# EAGLE board FT232R-Breakout-GiantPanel-v37 (EAGLE 6.5.0), part 1 of 8
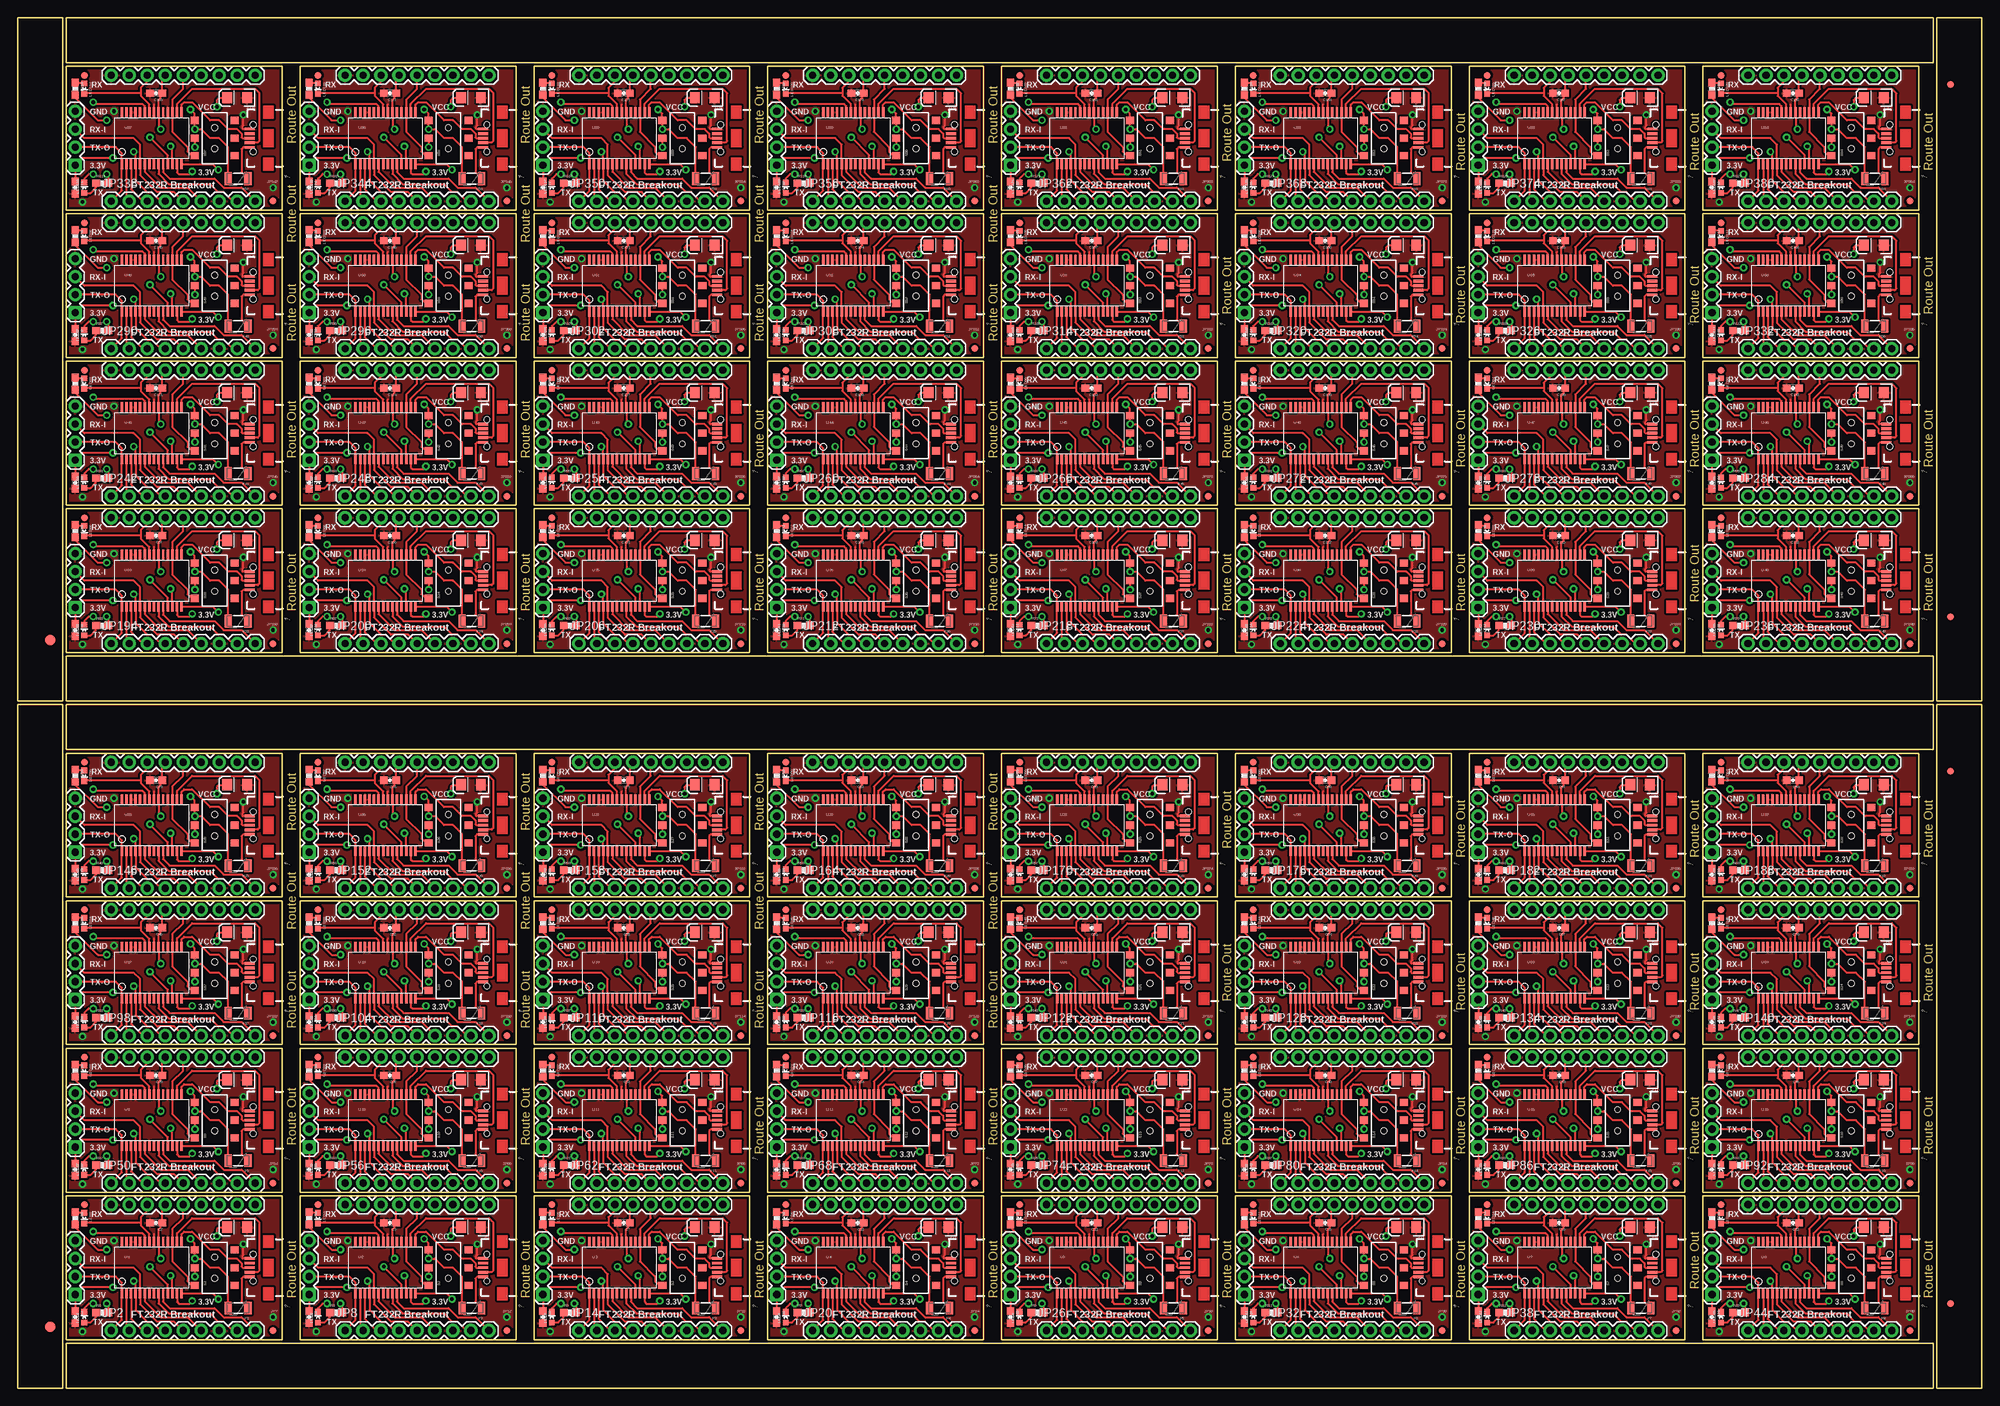
[diagram p0: board, top side]
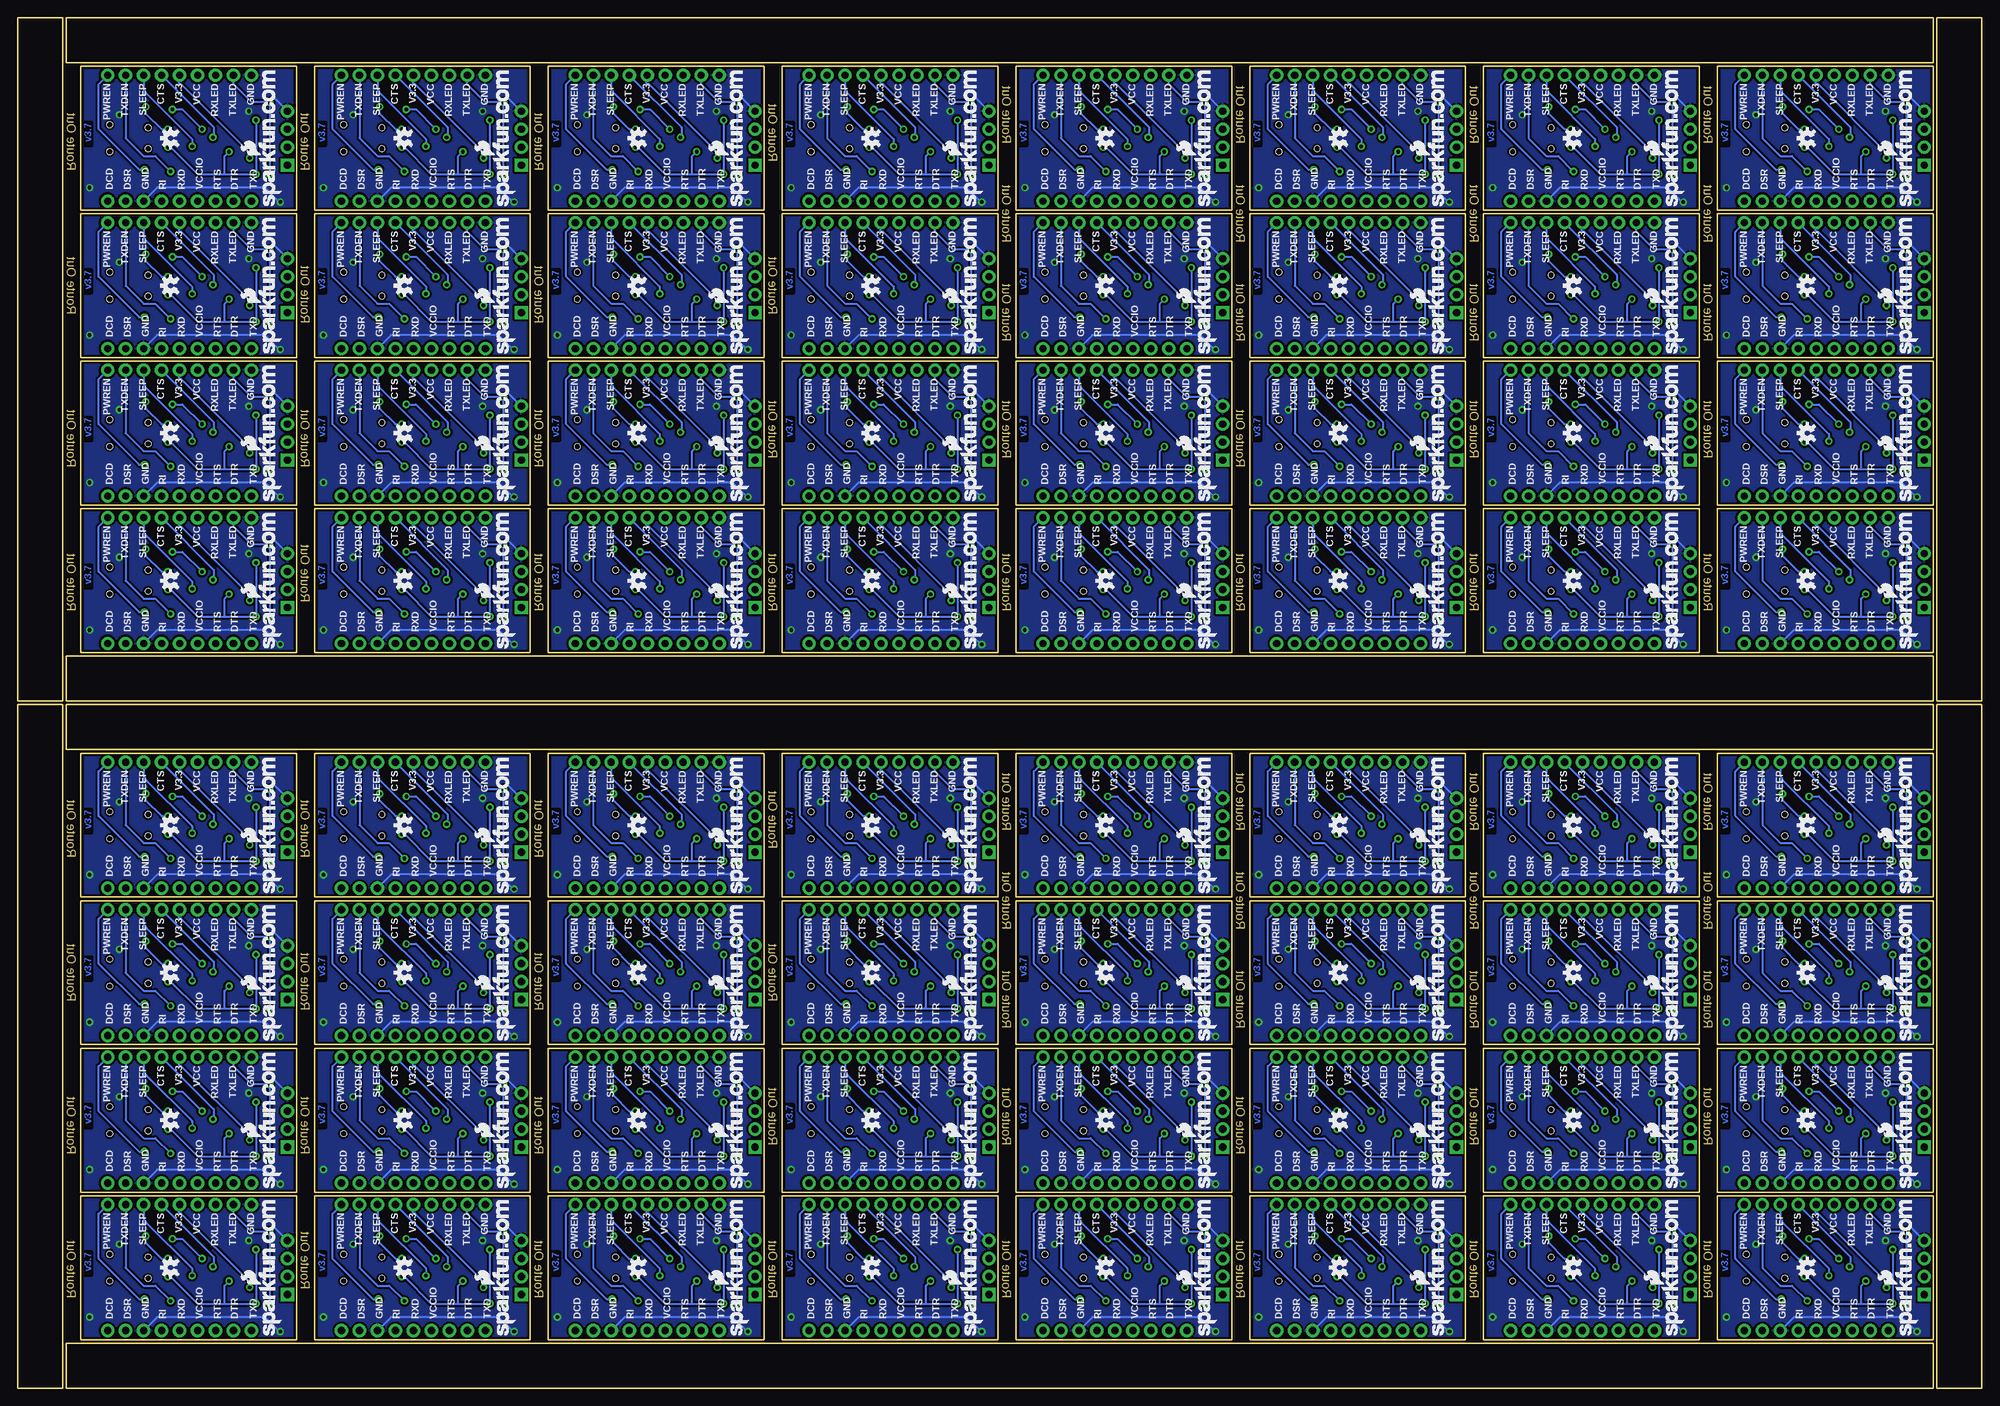
[diagram p1: board, bottom side, seen from below]

Size 277.37 x 193.55 mm. Coordinates in mm from the lower left corner, seen from the top.
Outline: 296 segments
Copper layers (1*16): Top 0.035mm / dielectric 1.5mm / Bottom 0.035mm
Design rules "SparkFun *": minimum track width 8mil, minimum drill 20mil, track to track 8mil, track to pad 8mil, pad to pad 8mil, via to via 8mil, smd to smd 8mil, copper to edge 10mil, drill to drill 8mil, minimum pad ring 12mil, minimum via ring 10mil, stop-mask expansion 4mil, vias tented up to drill 20mil, thermal gap 10mil
Net classes: 0 default: width 0.203 mm; 1 power: width 0.254 mm

## Footprints (pad centres in the part's own frame; a part is rotated, then mirrored left to right if it is on the bottom)
0603-CAP = smd 1.1 x 1: 1 -0.85,0; 2 0.85,0
EIA3216 = smd 1.4 x 1.6: A 1.4,0; C -1.4,0
FIDUCIAL-1.5X3 = smd 1.5 x 1.5: 1 0,0
FIDUCIAL-1X2 = smd 1 x 1: 1 0,0
PTC-1206 = smd 1 x 1.8: 1 -1.4,0; 2 1.4,0
1X09 = drill 1.016 pad 1.88: 1 0,0; 2 2.54,0; 3 5.08,0; 4 7.62,0; 5 10.16,0; 6 12.7,0; 7 15.24,0; 8 17.78,0; 9 20.32,0
1X04 = drill 1.016 pad 1.88 square: 1 0,0 | drill 1.016 pad 1.88: 2 2.54,0; 3 5.08,0; 4 7.62,0
USB-B-MICRO-SMD_V03 = smd 1.4 x 0.4: D+1 2.7,0; D-1 2.7,0.65; GND1 2.7,-1.3; ID1 2.7,-0.65; VBUS1 2.7,1.3 | hole 0.85: 2.2,1.9; 2.2,-1.9
LED-0603 = smd 0.8 x 0.8: A 0,-0.75; C 0,0.75
0603-RES = smd 1.1 x 1: 1 -0.85,0; 2 0.85,0
AYZ0202 = smd 1 x 1.15: 1 -2.5,2.825; 2 0,2.825; 3 2.5,2.825; 4 -2.5,-2.825; 5 0,-2.825; 6 2.5,-2.825 | hole 0.85: 1.5,0; -1.5,0
SSOP28DB = smd 0.348 x 1.397: 1 -4.225,-3.656; 2 -3.575,-3.656; 3 -2.925,-3.656; 4 -2.275,-3.656; 5 -1.625,-3.656; 6 -0.975,-3.656; 7 -0.325,-3.656; 8 0.325,-3.656; 9 0.975,-3.656; 10 1.625,-3.656; 11 2.275,-3.656; 12 2.925,-3.656; 13 3.575,-3.656; 14 4.225,-3.656; 15 4.225,3.656; 16 3.575,3.656; 17 2.925,3.656; 18 2.275,3.656; 19 1.625,3.656; 20 0.975,3.656; 21 0.325,3.656; 22 -0.325,3.656; 23 -0.975,3.656; 24 -1.625,3.656; 25 -2.275,3.656; 26 -2.925,3.656; 27 -3.575,3.656; 28 -4.225,3.656

## Placement (x,y rotation side)
C1  0.1uF  [0603-CAP]  8.13,10.03 270 top
C2  0.1uF  [0603-CAP]  19.56,23.37 180 top
C3  0.1uF  [0603-CAP]  52.58,23.37 180 top
C4  10uF  [EIA3216]  64.01,22.73 180 top
C5  10uF  [EIA3216]  30.99,22.73 180 top
C6  0.1uF  [0603-CAP]  41.15,10.03 270 top
C7  0.1uF  [0603-CAP]  85.6,23.37 180 top
C8  10uF  [EIA3216]  97.03,22.73 180 top
C9  0.1uF  [0603-CAP]  74.17,10.03 270 top
C10  0.1uF  [0603-CAP]  118.62,23.37 180 top
C11  10uF  [EIA3216]  130.05,22.73 180 top
C12  0.1uF  [0603-CAP]  107.19,10.03 270 top
C13  0.1uF  [0603-CAP]  151.64,23.37 180 top
C14  10uF  [EIA3216]  163.07,22.73 180 top
C15  0.1uF  [0603-CAP]  140.21,10.03 270 top
C16  0.1uF  [0603-CAP]  184.66,23.37 180 top
C17  10uF  [EIA3216]  196.09,22.73 180 top
C18  0.1uF  [0603-CAP]  173.23,10.03 270 top
C19  0.1uF  [0603-CAP]  217.68,23.37 180 top
C20  10uF  [EIA3216]  229.11,22.73 180 top
C21  0.1uF  [0603-CAP]  206.25,10.03 270 top
C22  0.1uF  [0603-CAP]  250.7,23.37 180 top
C23  10uF  [EIA3216]  262.13,22.73 180 top
C24  0.1uF  [0603-CAP]  239.27,10.03 270 top
C25  0.1uF  [0603-CAP]  19.56,44.2 180 top
C26  10uF  [EIA3216]  30.99,43.56 180 top
C27  0.1uF  [0603-CAP]  8.13,30.86 270 top
C28  0.1uF  [0603-CAP]  52.58,44.2 180 top
C29  10uF  [EIA3216]  64.01,43.56 180 top
C30  0.1uF  [0603-CAP]  41.15,30.86 270 top
C31  0.1uF  [0603-CAP]  85.6,44.2 180 top
C32  10uF  [EIA3216]  97.03,43.56 180 top
C33  0.1uF  [0603-CAP]  74.17,30.86 270 top
C34  0.1uF  [0603-CAP]  118.62,44.2 180 top
C35  10uF  [EIA3216]  130.05,43.56 180 top
C36  0.1uF  [0603-CAP]  107.19,30.86 270 top
C37  0.1uF  [0603-CAP]  151.64,44.2 180 top
C38  10uF  [EIA3216]  163.07,43.56 180 top
C39  0.1uF  [0603-CAP]  140.21,30.86 270 top
C40  0.1uF  [0603-CAP]  184.66,44.2 180 top
C41  10uF  [EIA3216]  196.09,43.56 180 top
C42  0.1uF  [0603-CAP]  173.23,30.86 270 top
C43  0.1uF  [0603-CAP]  217.68,44.2 180 top
C44  10uF  [EIA3216]  229.11,43.56 180 top
C45  0.1uF  [0603-CAP]  206.25,30.86 270 top
C46  0.1uF  [0603-CAP]  250.7,44.2 180 top
C47  10uF  [EIA3216]  262.13,43.56 180 top
C48  0.1uF  [0603-CAP]  239.27,30.86 270 top
C49  0.1uF  [0603-CAP]  19.56,65.02 180 top
C50  10uF  [EIA3216]  30.99,64.39 180 top
C51  0.1uF  [0603-CAP]  8.13,51.69 270 top
C52  0.1uF  [0603-CAP]  52.58,65.02 180 top
C53  10uF  [EIA3216]  64.01,64.39 180 top
C54  0.1uF  [0603-CAP]  41.15,51.69 270 top
C55  0.1uF  [0603-CAP]  85.6,65.02 180 top
C56  10uF  [EIA3216]  97.03,64.39 180 top
C57  0.1uF  [0603-CAP]  74.17,51.69 270 top
C58  0.1uF  [0603-CAP]  118.62,65.02 180 top
C59  10uF  [EIA3216]  130.05,64.39 180 top
C60  0.1uF  [0603-CAP]  107.19,51.69 270 top
C61  0.1uF  [0603-CAP]  151.64,65.02 180 top
C62  10uF  [EIA3216]  163.07,64.39 180 top
C63  0.1uF  [0603-CAP]  140.21,51.69 270 top
C64  0.1uF  [0603-CAP]  184.66,65.02 180 top
C65  10uF  [EIA3216]  196.09,64.39 180 top
C66  0.1uF  [0603-CAP]  173.23,51.69 270 top
C67  0.1uF  [0603-CAP]  217.68,65.02 180 top
C68  10uF  [EIA3216]  229.11,64.39 180 top
C69  0.1uF  [0603-CAP]  206.25,51.69 270 top
C70  0.1uF  [0603-CAP]  250.7,65.02 180 top
C71  10uF  [EIA3216]  262.13,64.39 180 top
C72  0.1uF  [0603-CAP]  239.27,51.69 270 top
C73  0.1uF  [0603-CAP]  19.56,85.85 180 top
C74  10uF  [EIA3216]  30.99,85.22 180 top
C75  0.1uF  [0603-CAP]  8.13,72.52 270 top
C76  0.1uF  [0603-CAP]  52.58,85.85 180 top
C77  10uF  [EIA3216]  64.01,85.22 180 top
C78  0.1uF  [0603-CAP]  41.15,72.52 270 top
C79  0.1uF  [0603-CAP]  85.6,85.85 180 top
C80  10uF  [EIA3216]  97.03,85.22 180 top
C81  0.1uF  [0603-CAP]  74.17,72.52 270 top
C82  0.1uF  [0603-CAP]  118.62,85.85 180 top
C83  10uF  [EIA3216]  130.05,85.22 180 top
C84  0.1uF  [0603-CAP]  107.19,72.52 270 top
C85  0.1uF  [0603-CAP]  151.64,85.85 180 top
C86  10uF  [EIA3216]  163.07,85.22 180 top
C87  0.1uF  [0603-CAP]  140.21,72.52 270 top
C88  0.1uF  [0603-CAP]  184.66,85.85 180 top
C89  10uF  [EIA3216]  196.09,85.22 180 top
C90  0.1uF  [0603-CAP]  173.23,72.52 270 top
C91  0.1uF  [0603-CAP]  217.68,85.85 180 top
C92  10uF  [EIA3216]  229.11,85.22 180 top
C93  0.1uF  [0603-CAP]  206.25,72.52 270 top
C94  0.1uF  [0603-CAP]  250.7,85.85 180 top
C95  10uF  [EIA3216]  262.13,85.22 180 top
C96  0.1uF  [0603-CAP]  239.27,72.52 270 top
C97  0.1uF  [0603-CAP]  19.56,120.4 180 top
C98  10uF  [EIA3216]  30.99,119.76 180 top
C99  0.1uF  [0603-CAP]  8.13,107.06 270 top
C100  0.1uF  [0603-CAP]  52.58,120.4 180 top
C101  10uF  [EIA3216]  64.01,119.76 180 top
C102  0.1uF  [0603-CAP]  41.15,107.06 270 top
C103  0.1uF  [0603-CAP]  85.6,120.4 180 top
C104  10uF  [EIA3216]  97.03,119.76 180 top
C105  0.1uF  [0603-CAP]  74.17,107.06 270 top
C106  0.1uF  [0603-CAP]  118.62,120.4 180 top
C107  10uF  [EIA3216]  130.05,119.76 180 top
C108  0.1uF  [0603-CAP]  107.19,107.06 270 top
C109  0.1uF  [0603-CAP]  151.64,120.4 180 top
C110  10uF  [EIA3216]  163.07,119.76 180 top
C111  0.1uF  [0603-CAP]  140.21,107.06 270 top
C112  0.1uF  [0603-CAP]  184.66,120.4 180 top
C113  10uF  [EIA3216]  196.09,119.76 180 top
C114  0.1uF  [0603-CAP]  173.23,107.06 270 top
C115  0.1uF  [0603-CAP]  217.68,120.4 180 top
C116  10uF  [EIA3216]  229.11,119.76 180 top
C117  0.1uF  [0603-CAP]  206.25,107.06 270 top
C118  0.1uF  [0603-CAP]  250.7,120.4 180 top
C119  10uF  [EIA3216]  262.13,119.76 180 top
C120  0.1uF  [0603-CAP]  239.27,107.06 270 top
C121  0.1uF  [0603-CAP]  19.56,141.22 180 top
C122  10uF  [EIA3216]  30.99,140.59 180 top
C123  0.1uF  [0603-CAP]  8.13,127.89 270 top
C124  0.1uF  [0603-CAP]  52.58,141.22 180 top
C125  10uF  [EIA3216]  64.01,140.59 180 top
C126  0.1uF  [0603-CAP]  41.15,127.89 270 top
C127  0.1uF  [0603-CAP]  85.6,141.22 180 top
C128  10uF  [EIA3216]  97.03,140.59 180 top
C129  0.1uF  [0603-CAP]  74.17,127.89 270 top
C130  0.1uF  [0603-CAP]  118.62,141.22 180 top
C131  10uF  [EIA3216]  130.05,140.59 180 top
C132  0.1uF  [0603-CAP]  107.19,127.89 270 top
C133  0.1uF  [0603-CAP]  151.64,141.22 180 top
C134  10uF  [EIA3216]  163.07,140.59 180 top
C135  0.1uF  [0603-CAP]  140.21,127.89 270 top
C136  0.1uF  [0603-CAP]  184.66,141.22 180 top
C137  10uF  [EIA3216]  196.09,140.59 180 top
C138  0.1uF  [0603-CAP]  173.23,127.89 270 top
C139  0.1uF  [0603-CAP]  217.68,141.22 180 top
C140  10uF  [EIA3216]  229.11,140.59 180 top
C141  0.1uF  [0603-CAP]  206.25,127.89 270 top
C142  0.1uF  [0603-CAP]  250.7,141.22 180 top
C143  10uF  [EIA3216]  262.13,140.59 180 top
C144  0.1uF  [0603-CAP]  239.27,127.89 270 top
C145  0.1uF  [0603-CAP]  19.56,162.05 180 top
C146  10uF  [EIA3216]  30.99,161.42 180 top
C147  0.1uF  [0603-CAP]  8.13,148.72 270 top
C148  0.1uF  [0603-CAP]  52.58,162.05 180 top
C149  10uF  [EIA3216]  64.01,161.42 180 top
C150  0.1uF  [0603-CAP]  41.15,148.72 270 top
C151  0.1uF  [0603-CAP]  85.6,162.05 180 top
C152  10uF  [EIA3216]  97.03,161.42 180 top
C153  0.1uF  [0603-CAP]  74.17,148.72 270 top
C154  0.1uF  [0603-CAP]  118.62,162.05 180 top
C155  10uF  [EIA3216]  130.05,161.42 180 top
C156  0.1uF  [0603-CAP]  107.19,148.72 270 top
C157  0.1uF  [0603-CAP]  151.64,162.05 180 top
C158  10uF  [EIA3216]  163.07,161.42 180 top
C159  0.1uF  [0603-CAP]  140.21,148.72 270 top
C160  0.1uF  [0603-CAP]  184.66,162.05 180 top
C161  10uF  [EIA3216]  196.09,161.42 180 top
C162  0.1uF  [0603-CAP]  173.23,148.72 270 top
C163  0.1uF  [0603-CAP]  217.68,162.05 180 top
C164  10uF  [EIA3216]  229.11,161.42 180 top
C165  0.1uF  [0603-CAP]  206.25,148.72 270 top
C166  0.1uF  [0603-CAP]  250.7,162.05 180 top
C167  10uF  [EIA3216]  262.13,161.42 180 top
C168  0.1uF  [0603-CAP]  239.27,148.72 270 top
C169  0.1uF  [0603-CAP]  19.56,182.88 180 top
C170  10uF  [EIA3216]  30.99,182.25 180 top
C171  0.1uF  [0603-CAP]  8.13,169.54 270 top
C172  0.1uF  [0603-CAP]  52.58,182.88 180 top
C173  10uF  [EIA3216]  64.01,182.25 180 top
C174  0.1uF  [0603-CAP]  41.15,169.54 270 top
C175  0.1uF  [0603-CAP]  85.6,182.88 180 top
C176  10uF  [EIA3216]  97.03,182.25 180 top
C177  0.1uF  [0603-CAP]  74.17,169.54 270 top
C178  0.1uF  [0603-CAP]  118.62,182.88 180 top
C179  10uF  [EIA3216]  130.05,182.25 180 top
C180  0.1uF  [0603-CAP]  107.19,169.54 270 top
C181  0.1uF  [0603-CAP]  151.64,182.88 180 top
C182  10uF  [EIA3216]  163.07,182.25 180 top
C183  0.1uF  [0603-CAP]  140.21,169.54 270 top
C184  0.1uF  [0603-CAP]  184.66,182.88 180 top
C185  10uF  [EIA3216]  196.09,182.25 180 top
C186  0.1uF  [0603-CAP]  173.23,169.54 270 top
C187  0.1uF  [0603-CAP]  217.68,182.88 180 top
C188  10uF  [EIA3216]  229.11,182.25 180 top
C189  0.1uF  [0603-CAP]  206.25,169.54 270 top
C190  0.1uF  [0603-CAP]  250.7,182.88 180 top
C191  10uF  [EIA3216]  262.13,182.25 180 top
C192  0.1uF  [0603-CAP]  239.27,169.54 270 top
E$1  [FIDUCIAL-1.5X3]  4.57,8.64 0 top
E$2  [FIDUCIAL-1X2]  272.92,184.15 180 top
E$3  [FIDUCIAL-1X2]  272.92,108.97 0 top
E$4  [FIDUCIAL-1.5X3]  4.57,105.66 0 top
E$6  [FIDUCIAL-1X2]  272.92,87.12 180 top
E$8  [FIDUCIAL-1X2]  272.92,11.94 0 top
F1  500mA  [PTC-1206]  31.11,11.3 180 top
F2  500mA  [PTC-1206]  64.14,11.3 180 top
F3  500mA  [PTC-1206]  97.16,11.3 180 top
F4  500mA  [PTC-1206]  130.18,11.3 180 top
F5  500mA  [PTC-1206]  163.19,11.3 180 top
F6  500mA  [PTC-1206]  196.22,11.3 180 top
F7  500mA  [PTC-1206]  229.24,11.3 180 top
F8  500mA  [PTC-1206]  262.25,11.3 180 top
F9  500mA  [PTC-1206]  31.11,32.13 180 top
F10  500mA  [PTC-1206]  64.14,32.13 180 top
F11  500mA  [PTC-1206]  97.16,32.13 180 top
F12  500mA  [PTC-1206]  130.18,32.13 180 top
F13  500mA  [PTC-1206]  163.19,32.13 180 top
F14  500mA  [PTC-1206]  196.22,32.13 180 top
F15  500mA  [PTC-1206]  229.24,32.13 180 top
F16  500mA  [PTC-1206]  262.25,32.13 180 top
F17  500mA  [PTC-1206]  31.11,52.96 180 top
F18  500mA  [PTC-1206]  64.14,52.96 180 top
F19  500mA  [PTC-1206]  97.16,52.96 180 top
F20  500mA  [PTC-1206]  130.18,52.96 180 top
F21  500mA  [PTC-1206]  163.19,52.96 180 top
F22  500mA  [PTC-1206]  196.22,52.96 180 top
F23  500mA  [PTC-1206]  229.24,52.96 180 top
F24  500mA  [PTC-1206]  262.25,52.96 180 top
F25  500mA  [PTC-1206]  31.11,73.79 180 top
F26  500mA  [PTC-1206]  64.14,73.79 180 top
F27  500mA  [PTC-1206]  97.16,73.79 180 top
F28  500mA  [PTC-1206]  130.18,73.79 180 top
F29  500mA  [PTC-1206]  163.19,73.79 180 top
F30  500mA  [PTC-1206]  196.22,73.79 180 top
F31  500mA  [PTC-1206]  229.24,73.79 180 top
F32  500mA  [PTC-1206]  262.25,73.79 180 top
F33  500mA  [PTC-1206]  31.11,108.33 180 top
F34  500mA  [PTC-1206]  64.14,108.33 180 top
F35  500mA  [PTC-1206]  97.16,108.33 180 top
F36  500mA  [PTC-1206]  130.18,108.33 180 top
F37  500mA  [PTC-1206]  163.19,108.33 180 top
F38  500mA  [PTC-1206]  196.22,108.33 180 top
F39  500mA  [PTC-1206]  229.24,108.33 180 top
F40  500mA  [PTC-1206]  262.25,108.33 180 top
F41  500mA  [PTC-1206]  31.11,129.16 180 top
F42  500mA  [PTC-1206]  64.14,129.16 180 top
F43  500mA  [PTC-1206]  97.16,129.16 180 top
F44  500mA  [PTC-1206]  130.18,129.16 180 top
F45  500mA  [PTC-1206]  163.19,129.16 180 top
F46  500mA  [PTC-1206]  196.22,129.16 180 top
F47  500mA  [PTC-1206]  229.24,129.16 180 top
F48  500mA  [PTC-1206]  262.25,129.16 180 top
F49  500mA  [PTC-1206]  31.11,149.99 180 top
F50  500mA  [PTC-1206]  64.14,149.99 180 top
F51  500mA  [PTC-1206]  97.16,149.99 180 top
F52  500mA  [PTC-1206]  130.18,149.99 180 top
F53  500mA  [PTC-1206]  163.19,149.99 180 top
F54  500mA  [PTC-1206]  196.22,149.99 180 top
F55  500mA  [PTC-1206]  229.24,149.99 180 top
F56  500mA  [PTC-1206]  262.25,149.99 180 top
F57  500mA  [PTC-1206]  31.11,170.81 180 top
F58  500mA  [PTC-1206]  64.14,170.81 180 top
F59  500mA  [PTC-1206]  97.16,170.81 180 top
F60  500mA  [PTC-1206]  130.18,170.81 180 top
F61  500mA  [PTC-1206]  163.19,170.81 180 top
F62  500mA  [PTC-1206]  196.22,170.81 180 top
F63  500mA  [PTC-1206]  229.24,170.81 180 top
F64  500mA  [PTC-1206]  262.25,170.81 180 top
JP1  [1X09]  13.21,25.91 0 top
JP2  [1X09]  13.21,8.13 0 top
JP3  [1X04]  8.13,13.21 90 top
JP4  [1X09]  46.23,25.91 0 top
JP5  FIDUCIAL1X2  [FIDUCIAL-1X2]  36.07,8.13 0 top
JP6  FIDUCIAL1X2  [FIDUCIAL-1X2]  9.4,25.91 0 top
JP7  USB_MICROB_PLUGCONN-11752  [USB-B-MICRO-SMD_V03]  35.43,17.02 180 top
JP8  [1X09]  46.23,8.13 0 top
JP9  [1X04]  41.15,13.21 90 top
JP10  FIDUCIAL1X2  [FIDUCIAL-1X2]  69.09,8.13 0 top
JP11  FIDUCIAL1X2  [FIDUCIAL-1X2]  42.42,25.91 0 top
JP12  USB_MICROB_PLUGCONN-11752  [USB-B-MICRO-SMD_V03]  68.45,17.02 180 top
JP13  [1X09]  79.25,25.91 0 top
JP14  [1X09]  79.25,8.13 0 top
JP15  [1X04]  74.17,13.21 90 top
JP16  FIDUCIAL1X2  [FIDUCIAL-1X2]  102.11,8.13 0 top
JP17  FIDUCIAL1X2  [FIDUCIAL-1X2]  75.44,25.91 0 top
JP18  USB_MICROB_PLUGCONN-11752  [USB-B-MICRO-SMD_V03]  101.47,17.02 180 top
JP19  [1X09]  112.27,25.91 0 top
JP20  [1X09]  112.27,8.13 0 top
JP21  [1X04]  107.19,13.21 90 top
JP22  FIDUCIAL1X2  [FIDUCIAL-1X2]  135.13,8.13 0 top
JP23  FIDUCIAL1X2  [FIDUCIAL-1X2]  108.46,25.91 0 top
JP24  USB_MICROB_PLUGCONN-11752  [USB-B-MICRO-SMD_V03]  134.49,17.02 180 top
JP25  [1X09]  145.29,25.91 0 top
JP26  [1X09]  145.29,8.13 0 top
JP27  [1X04]  140.21,13.21 90 top
JP28  FIDUCIAL1X2  [FIDUCIAL-1X2]  168.15,8.13 0 top
JP29  FIDUCIAL1X2  [FIDUCIAL-1X2]  141.48,25.91 0 top
JP30  USB_MICROB_PLUGCONN-11752  [USB-B-MICRO-SMD_V03]  167.51,17.02 180 top
JP31  [1X09]  178.31,25.91 0 top
JP32  [1X09]  178.31,8.13 0 top
JP33  [1X04]  173.23,13.21 90 top
JP34  FIDUCIAL1X2  [FIDUCIAL-1X2]  201.17,8.13 0 top
JP35  FIDUCIAL1X2  [FIDUCIAL-1X2]  174.5,25.91 0 top
JP36  USB_MICROB_PLUGCONN-11752  [USB-B-MICRO-SMD_V03]  200.53,17.02 180 top
JP37  [1X09]  211.33,25.91 0 top
JP38  [1X09]  211.33,8.13 0 top
JP39  [1X04]  206.25,13.21 90 top
JP40  FIDUCIAL1X2  [FIDUCIAL-1X2]  234.19,8.13 0 top
JP41  FIDUCIAL1X2  [FIDUCIAL-1X2]  207.52,25.91 0 top
JP42  USB_MICROB_PLUGCONN-11752  [USB-B-MICRO-SMD_V03]  233.55,17.02 180 top
JP43  [1X09]  244.35,25.91 0 top
JP44  [1X09]  244.35,8.13 0 top
JP45  [1X04]  239.27,13.21 90 top
JP46  FIDUCIAL1X2  [FIDUCIAL-1X2]  267.21,8.13 0 top
JP47  FIDUCIAL1X2  [FIDUCIAL-1X2]  240.54,25.91 0 top
JP48  USB_MICROB_PLUGCONN-11752  [USB-B-MICRO-SMD_V03]  266.57,17.02 180 top
JP49  [1X09]  13.21,46.74 0 top
JP50  [1X09]  13.21,28.96 0 top
JP51  [1X04]  8.13,34.04 90 top
JP52  FIDUCIAL1X2  [FIDUCIAL-1X2]  36.07,28.96 0 top
JP53  FIDUCIAL1X2  [FIDUCIAL-1X2]  9.4,46.74 0 top
JP54  USB_MICROB_PLUGCONN-11752  [USB-B-MICRO-SMD_V03]  35.43,37.85 180 top
JP55  [1X09]  46.23,46.74 0 top
JP56  [1X09]  46.23,28.96 0 top
JP57  [1X04]  41.15,34.04 90 top
JP58  FIDUCIAL1X2  [FIDUCIAL-1X2]  69.09,28.96 0 top
JP59  FIDUCIAL1X2  [FIDUCIAL-1X2]  42.42,46.74 0 top
JP60  USB_MICROB_PLUGCONN-11752  [USB-B-MICRO-SMD_V03]  68.45,37.85 180 top
JP61  [1X09]  79.25,46.74 0 top
JP62  [1X09]  79.25,28.96 0 top
JP63  [1X04]  74.17,34.04 90 top
JP64  FIDUCIAL1X2  [FIDUCIAL-1X2]  102.11,28.96 0 top
JP65  FIDUCIAL1X2  [FIDUCIAL-1X2]  75.44,46.74 0 top
JP66  USB_MICROB_PLUGCONN-11752  [USB-B-MICRO-SMD_V03]  101.47,37.85 180 top
JP67  [1X09]  112.27,46.74 0 top
JP68  [1X09]  112.27,28.96 0 top
JP69  [1X04]  107.19,34.04 90 top
JP70  FIDUCIAL1X2  [FIDUCIAL-1X2]  135.13,28.96 0 top
JP71  FIDUCIAL1X2  [FIDUCIAL-1X2]  108.46,46.74 0 top
JP72  USB_MICROB_PLUGCONN-11752  [USB-B-MICRO-SMD_V03]  134.49,37.85 180 top
JP73  [1X09]  145.29,46.74 0 top
JP74  [1X09]  145.29,28.96 0 top
JP75  [1X04]  140.21,34.04 90 top
JP76  FIDUCIAL1X2  [FIDUCIAL-1X2]  168.15,28.96 0 top
JP77  FIDUCIAL1X2  [FIDUCIAL-1X2]  141.48,46.74 0 top
JP78  USB_MICROB_PLUGCONN-11752  [USB-B-MICRO-SMD_V03]  167.51,37.85 180 top
JP79  [1X09]  178.31,46.74 0 top
JP80  [1X09]  178.31,28.96 0 top
JP81  [1X04]  173.23,34.04 90 top
JP82  FIDUCIAL1X2  [FIDUCIAL-1X2]  201.17,28.96 0 top
JP83  FIDUCIAL1X2  [FIDUCIAL-1X2]  174.5,46.74 0 top
JP84  USB_MICROB_PLUGCONN-11752  [USB-B-MICRO-SMD_V03]  200.53,37.85 180 top
JP85  [1X09]  211.33,46.74 0 top
JP86  [1X09]  211.33,28.96 0 top
JP87  [1X04]  206.25,34.04 90 top
JP88  FIDUCIAL1X2  [FIDUCIAL-1X2]  234.19,28.96 0 top
JP89  FIDUCIAL1X2  [FIDUCIAL-1X2]  207.52,46.74 0 top
JP90  USB_MICROB_PLUGCONN-11752  [USB-B-MICRO-SMD_V03]  233.55,37.85 180 top
JP91  [1X09]  244.35,46.74 0 top
JP92  [1X09]  244.35,28.96 0 top
JP93  [1X04]  239.27,34.04 90 top
JP94  FIDUCIAL1X2  [FIDUCIAL-1X2]  267.21,28.96 0 top
JP95  FIDUCIAL1X2  [FIDUCIAL-1X2]  240.54,46.74 0 top
JP96  USB_MICROB_PLUGCONN-11752  [USB-B-MICRO-SMD_V03]  266.57,37.85 180 top
JP97  [1X09]  13.21,67.56 0 top
JP98  [1X09]  13.21,49.78 0 top
JP99  [1X04]  8.13,54.86 90 top
JP100  FIDUCIAL1X2  [FIDUCIAL-1X2]  36.07,49.78 0 top
JP101  FIDUCIAL1X2  [FIDUCIAL-1X2]  9.4,67.56 0 top
JP102  USB_MICROB_PLUGCONN-11752  [USB-B-MICRO-SMD_V03]  35.43,58.67 180 top
JP103  [1X09]  46.23,67.56 0 top
JP104  [1X09]  46.23,49.78 0 top
JP105  [1X04]  41.15,54.86 90 top
JP106  FIDUCIAL1X2  [FIDUCIAL-1X2]  69.09,49.78 0 top
JP107  FIDUCIAL1X2  [FIDUCIAL-1X2]  42.42,67.56 0 top
JP108  USB_MICROB_PLUGCONN-11752  [USB-B-MICRO-SMD_V03]  68.45,58.67 180 top
JP109  [1X09]  79.25,67.56 0 top
JP110  [1X09]  79.25,49.78 0 top
JP111  [1X04]  74.17,54.86 90 top
JP112  FIDUCIAL1X2  [FIDUCIAL-1X2]  102.11,49.78 0 top
JP113  FIDUCIAL1X2  [FIDUCIAL-1X2]  75.44,67.56 0 top
JP114  USB_MICROB_PLUGCONN-11752  [USB-B-MICRO-SMD_V03]  101.47,58.67 180 top
JP115  [1X09]  112.27,67.56 0 top
JP116  [1X09]  112.27,49.78 0 top
JP117  [1X04]  107.19,54.86 90 top
JP118  FIDUCIAL1X2  [FIDUCIAL-1X2]  135.13,49.78 0 top
JP119  FIDUCIAL1X2  [FIDUCIAL-1X2]  108.46,67.56 0 top
JP120  USB_MICROB_PLUGCONN-11752  [USB-B-MICRO-SMD_V03]  134.49,58.67 180 top
JP121  [1X09]  145.29,67.56 0 top
JP122  [1X09]  145.29,49.78 0 top
JP123  [1X04]  140.21,54.86 90 top
JP124  FIDUCIAL1X2  [FIDUCIAL-1X2]  168.15,49.78 0 top
JP125  FIDUCIAL1X2  [FIDUCIAL-1X2]  141.48,67.56 0 top
JP126  USB_MICROB_PLUGCONN-11752  [USB-B-MICRO-SMD_V03]  167.51,58.67 180 top
JP127  [1X09]  178.31,67.56 0 top
JP128  [1X09]  178.31,49.78 0 top
JP129  [1X04]  173.23,54.86 90 top
JP130  FIDUCIAL1X2  [FIDUCIAL-1X2]  201.17,49.78 0 top
JP131  FIDUCIAL1X2  [FIDUCIAL-1X2]  174.5,67.56 0 top
JP132  USB_MICROB_PLUGCONN-11752  [USB-B-MICRO-SMD_V03]  200.53,58.67 180 top
JP133  [1X09]  211.33,67.56 0 top
JP134  [1X09]  211.33,49.78 0 top
JP135  [1X04]  206.25,54.86 90 top
JP136  FIDUCIAL1X2  [FIDUCIAL-1X2]  234.19,49.78 0 top
JP137  FIDUCIAL1X2  [FIDUCIAL-1X2]  207.52,67.56 0 top
JP138  USB_MICROB_PLUGCONN-11752  [USB-B-MICRO-SMD_V03]  233.55,58.67 180 top
JP139  [1X09]  244.35,67.56 0 top
JP140  [1X09]  244.35,49.78 0 top
JP141  [1X04]  239.27,54.86 90 top
JP142  FIDUCIAL1X2  [FIDUCIAL-1X2]  267.21,49.78 0 top
JP143  FIDUCIAL1X2  [FIDUCIAL-1X2]  240.54,67.56 0 top
JP144  USB_MICROB_PLUGCONN-11752  [USB-B-MICRO-SMD_V03]  266.57,58.67 180 top
JP145  [1X09]  13.21,88.39 0 top
JP146  [1X09]  13.21,70.61 0 top
JP147  [1X04]  8.13,75.69 90 top
JP148  FIDUCIAL1X2  [FIDUCIAL-1X2]  36.07,70.61 0 top
JP149  FIDUCIAL1X2  [FIDUCIAL-1X2]  9.4,88.39 0 top
JP150  USB_MICROB_PLUGCONN-11752  [USB-B-MICRO-SMD_V03]  35.43,79.5 180 top
JP151  [1X09]  46.23,88.39 0 top
JP152  [1X09]  46.23,70.61 0 top
JP153  [1X04]  41.15,75.69 90 top
JP154  FIDUCIAL1X2  [FIDUCIAL-1X2]  69.09,70.61 0 top
JP155  FIDUCIAL1X2  [FIDUCIAL-1X2]  42.42,88.39 0 top
JP156  USB_MICROB_PLUGCONN-11752  [USB-B-MICRO-SMD_V03]  68.45,79.5 180 top
JP157  [1X09]  79.25,88.39 0 top
JP158  [1X09]  79.25,70.61 0 top
JP159  [1X04]  74.17,75.69 90 top
JP160  FIDUCIAL1X2  [FIDUCIAL-1X2]  102.11,70.61 0 top
JP161  FIDUCIAL1X2  [FIDUCIAL-1X2]  75.44,88.39 0 top
JP162  USB_MICROB_PLUGCONN-11752  [USB-B-MICRO-SMD_V03]  101.47,79.5 180 top
JP163  [1X09]  112.27,88.39 0 top
JP164  [1X09]  112.27,70.61 0 top
JP165  [1X04]  107.19,75.69 90 top
JP166  FIDUCIAL1X2  [FIDUCIAL-1X2]  135.13,70.61 0 top
JP167  FIDUCIAL1X2  [FIDUCIAL-1X2]  108.46,88.39 0 top
JP168  USB_MICROB_PLUGCONN-11752  [USB-B-MICRO-SMD_V03]  134.49,79.5 180 top
JP169  [1X09]  145.29,88.39 0 top
JP170  [1X09]  145.29,70.61 0 top
JP171  [1X04]  140.21,75.69 90 top
JP172  FIDUCIAL1X2  [FIDUCIAL-1X2]  168.15,70.61 0 top
JP173  FIDUCIAL1X2  [FIDUCIAL-1X2]  141.48,88.39 0 top
JP174  USB_MICROB_PLUGCONN-11752  [USB-B-MICRO-SMD_V03]  167.51,79.5 180 top
JP175  [1X09]  178.31,88.39 0 top
JP176  [1X09]  178.31,70.61 0 top
JP177  [1X04]  173.23,75.69 90 top
JP178  FIDUCIAL1X2  [FIDUCIAL-1X2]  201.17,70.61 0 top
JP179  FIDUCIAL1X2  [FIDUCIAL-1X2]  174.5,88.39 0 top
JP180  USB_MICROB_PLUGCONN-11752  [USB-B-MICRO-SMD_V03]  200.53,79.5 180 top
JP181  [1X09]  211.33,88.39 0 top
JP182  [1X09]  211.33,70.61 0 top
JP183  [1X04]  206.25,75.69 90 top
JP184  FIDUCIAL1X2  [FIDUCIAL-1X2]  234.19,70.61 0 top
JP185  FIDUCIAL1X2  [FIDUCIAL-1X2]  207.52,88.39 0 top
JP186  USB_MICROB_PLUGCONN-11752  [USB-B-MICRO-SMD_V03]  233.55,79.5 180 top
JP187  [1X09]  244.35,88.39 0 top
JP188  [1X09]  244.35,70.61 0 top
JP189  [1X04]  239.27,75.69 90 top
JP190  FIDUCIAL1X2  [FIDUCIAL-1X2]  267.21,70.61 0 top
JP191  FIDUCIAL1X2  [FIDUCIAL-1X2]  240.54,88.39 0 top
JP192  USB_MICROB_PLUGCONN-11752  [USB-B-MICRO-SMD_V03]  266.57,79.5 180 top
JP193  [1X09]  13.21,122.94 0 top
JP194  [1X09]  13.21,105.16 0 top
JP195  [1X04]  8.13,110.24 90 top
JP196  FIDUCIAL1X2  [FIDUCIAL-1X2]  36.07,105.16 0 top
JP197  FIDUCIAL1X2  [FIDUCIAL-1X2]  9.4,122.94 0 top
JP198  USB_MICROB_PLUGCONN-11752  [USB-B-MICRO-SMD_V03]  35.43,114.05 180 top
JP199  [1X09]  46.23,122.94 0 top
JP200  [1X09]  46.23,105.16 0 top
JP201  [1X04]  41.15,110.24 90 top
JP202  FIDUCIAL1X2  [FIDUCIAL-1X2]  69.09,105.16 0 top
JP203  FIDUCIAL1X2  [FIDUCIAL-1X2]  42.42,122.94 0 top
JP204  USB_MICROB_PLUGCONN-11752  [USB-B-MICRO-SMD_V03]  68.45,114.05 180 top
JP205  [1X09]  79.25,122.94 0 top
JP206  [1X09]  79.25,105.16 0 top
JP207  [1X04]  74.17,110.24 90 top
JP208  FIDUCIAL1X2  [FIDUCIAL-1X2]  102.11,105.16 0 top
JP209  FIDUCIAL1X2  [FIDUCIAL-1X2]  75.44,122.94 0 top
JP210  USB_MICROB_PLUGCONN-11752  [USB-B-MICRO-SMD_V03]  101.47,114.05 180 top
JP211  [1X09]  112.27,122.94 0 top
JP212  [1X09]  112.27,105.16 0 top
JP213  [1X04]  107.19,110.24 90 top
JP214  FIDUCIAL1X2  [FIDUCIAL-1X2]  135.13,105.16 0 top
JP215  FIDUCIAL1X2  [FIDUCIAL-1X2]  108.46,122.94 0 top
JP216  USB_MICROB_PLUGCONN-11752  [USB-B-MICRO-SMD_V03]  134.49,114.05 180 top
JP217  [1X09]  145.29,122.94 0 top
JP218  [1X09]  145.29,105.16 0 top
JP219  [1X04]  140.21,110.24 90 top
JP220  FIDUCIAL1X2  [FIDUCIAL-1X2]  168.15,105.16 0 top
JP221  FIDUCIAL1X2  [FIDUCIAL-1X2]  141.48,122.94 0 top
JP222  USB_MICROB_PLUGCONN-11752  [USB-B-MICRO-SMD_V03]  167.51,114.05 180 top
JP223  [1X09]  178.31,122.94 0 top
JP224  [1X09]  178.31,105.16 0 top
JP225  [1X04]  173.23,110.24 90 top
JP226  FIDUCIAL1X2  [FIDUCIAL-1X2]  201.17,105.16 0 top
JP227  FIDUCIAL1X2  [FIDUCIAL-1X2]  174.5,122.94 0 top
JP228  USB_MICROB_PLUGCONN-11752  [USB-B-MICRO-SMD_V03]  200.53,114.05 180 top
JP229  [1X09]  211.33,122.94 0 top
JP230  [1X09]  211.33,105.16 0 top
JP231  [1X04]  206.25,110.24 90 top
JP232  FIDUCIAL1X2  [FIDUCIAL-1X2]  234.19,105.16 0 top
JP233  FIDUCIAL1X2  [FIDUCIAL-1X2]  207.52,122.94 0 top
JP234  USB_MICROB_PLUGCONN-11752  [USB-B-MICRO-SMD_V03]  233.55,114.05 180 top
JP235  [1X09]  244.35,122.94 0 top
JP236  [1X09]  244.35,105.16 0 top
JP237  [1X04]  239.27,110.24 90 top
JP238  FIDUCIAL1X2  [FIDUCIAL-1X2]  267.21,105.16 0 top
JP239  FIDUCIAL1X2  [FIDUCIAL-1X2]  240.54,122.94 0 top
JP240  USB_MICROB_PLUGCONN-11752  [USB-B-MICRO-SMD_V03]  266.57,114.05 180 top
JP241  [1X09]  13.21,143.76 0 top
JP242  [1X09]  13.21,125.98 0 top
JP243  [1X04]  8.13,131.06 90 top
JP244  FIDUCIAL1X2  [FIDUCIAL-1X2]  36.07,125.98 0 top
JP245  FIDUCIAL1X2  [FIDUCIAL-1X2]  9.4,143.76 0 top
JP246  USB_MICROB_PLUGCONN-11752  [USB-B-MICRO-SMD_V03]  35.43,134.87 180 top
JP247  [1X09]  46.23,143.76 0 top
JP248  [1X09]  46.23,125.98 0 top
JP249  [1X04]  41.15,131.06 90 top
JP250  FIDUCIAL1X2  [FIDUCIAL-1X2]  69.09,125.98 0 top
JP251  FIDUCIAL1X2  [FIDUCIAL-1X2]  42.42,143.76 0 top
JP252  USB_MICROB_PLUGCONN-11752  [USB-B-MICRO-SMD_V03]  68.45,134.87 180 top
JP253  [1X09]  79.25,143.76 0 top
JP254  [1X09]  79.25,125.98 0 top
JP255  [1X04]  74.17,131.06 90 top
JP256  FIDUCIAL1X2  [FIDUCIAL-1X2]  102.11,125.98 0 top
JP257  FIDUCIAL1X2  [FIDUCIAL-1X2]  75.44,143.76 0 top
JP258  USB_MICROB_PLUGCONN-11752  [USB-B-MICRO-SMD_V03]  101.47,134.87 180 top
JP259  [1X09]  112.27,143.76 0 top
JP260  [1X09]  112.27,125.98 0 top
JP261  [1X04]  107.19,131.06 90 top
JP262  FIDUCIAL1X2  [FIDUCIAL-1X2]  135.13,125.98 0 top
JP263  FIDUCIAL1X2  [FIDUCIAL-1X2]  108.46,143.76 0 top
JP264  USB_MICROB_PLUGCONN-11752  [USB-B-MICRO-SMD_V03]  134.49,134.87 180 top
JP265  [1X09]  145.29,143.76 0 top
JP266  [1X09]  145.29,125.98 0 top
JP267  [1X04]  140.21,131.06 90 top
JP268  FIDUCIAL1X2  [FIDUCIAL-1X2]  168.15,125.98 0 top
JP269  FIDUCIAL1X2  [FIDUCIAL-1X2]  141.48,143.76 0 top
JP270  USB_MICROB_PLUGCONN-11752  [USB-B-MICRO-SMD_V03]  167.51,134.87 180 top
JP271  [1X09]  178.31,143.76 0 top
JP272  [1X09]  178.31,125.98 0 top
JP273  [1X04]  173.23,131.06 90 top
JP274  FIDUCIAL1X2  [FIDUCIAL-1X2]  201.17,125.98 0 top
JP275  FIDUCIAL1X2  [FIDUCIAL-1X2]  174.5,143.76 0 top
JP276  USB_MICROB_PLUGCONN-11752  [USB-B-MICRO-SMD_V03]  200.53,134.87 180 top
JP277  [1X09]  211.33,143.76 0 top
JP278  [1X09]  211.33,125.98 0 top
JP279  [1X04]  206.25,131.06 90 top
JP280  FIDUCIAL1X2  [FIDUCIAL-1X2]  234.19,125.98 0 top
JP281  FIDUCIAL1X2  [FIDUCIAL-1X2]  207.52,143.76 0 top
JP282  USB_MICROB_PLUGCONN-11752  [USB-B-MICRO-SMD_V03]  233.55,134.87 180 top
JP283  [1X09]  244.35,143.76 0 top
JP284  [1X09]  244.35,125.98 0 top
JP285  [1X04]  239.27,131.06 90 top
JP286  FIDUCIAL1X2  [FIDUCIAL-1X2]  267.21,125.98 0 top
JP287  FIDUCIAL1X2  [FIDUCIAL-1X2]  240.54,143.76 0 top
JP288  USB_MICROB_PLUGCONN-11752  [USB-B-MICRO-SMD_V03]  266.57,134.87 180 top
JP289  [1X09]  13.21,164.59 0 top
JP290  [1X09]  13.21,146.81 0 top
JP291  [1X04]  8.13,151.89 90 top
JP292  FIDUCIAL1X2  [FIDUCIAL-1X2]  36.07,146.81 0 top
JP293  FIDUCIAL1X2  [FIDUCIAL-1X2]  9.4,164.59 0 top
JP294  USB_MICROB_PLUGCONN-11752  [USB-B-MICRO-SMD_V03]  35.43,155.7 180 top
JP295  [1X09]  46.23,164.59 0 top
JP296  [1X09]  46.23,146.81 0 top
JP297  [1X04]  41.15,151.89 90 top
JP298  FIDUCIAL1X2  [FIDUCIAL-1X2]  69.09,146.81 0 top
JP299  FIDUCIAL1X2  [FIDUCIAL-1X2]  42.42,164.59 0 top
JP300  USB_MICROB_PLUGCONN-11752  [USB-B-MICRO-SMD_V03]  68.45,155.7 180 top
JP301  [1X09]  79.25,164.59 0 top
JP302  [1X09]  79.25,146.81 0 top
JP303  [1X04]  74.17,151.89 90 top
JP304  FIDUCIAL1X2  [FIDUCIAL-1X2]  102.11,146.81 0 top
JP305  FIDUCIAL1X2  [FIDUCIAL-1X2]  75.44,164.59 0 top
JP306  USB_MICROB_PLUGCONN-11752  [USB-B-MICRO-SMD_V03]  101.47,155.7 180 top
JP307  [1X09]  112.27,164.59 0 top
JP308  [1X09]  112.27,146.81 0 top
JP309  [1X04]  107.19,151.89 90 top
JP310  FIDUCIAL1X2  [FIDUCIAL-1X2]  135.13,146.81 0 top
JP311  FIDUCIAL1X2  [FIDUCIAL-1X2]  108.46,164.59 0 top
JP312  USB_MICROB_PLUGCONN-11752  [USB-B-MICRO-SMD_V03]  134.49,155.7 180 top
JP313  [1X09]  145.29,164.59 0 top
JP314  [1X09]  145.29,146.81 0 top
JP315  [1X04]  140.21,151.89 90 top
JP316  FIDUCIAL1X2  [FIDUCIAL-1X2]  168.15,146.81 0 top
JP317  FIDUCIAL1X2  [FIDUCIAL-1X2]  141.48,164.59 0 top
JP318  USB_MICROB_PLUGCONN-11752  [USB-B-MICRO-SMD_V03]  167.51,155.7 180 top
JP319  [1X09]  178.31,164.59 0 top
JP320  [1X09]  178.31,146.81 0 top
JP321  [1X04]  173.23,151.89 90 top
JP322  FIDUCIAL1X2  [FIDUCIAL-1X2]  201.17,146.81 0 top
JP323  FIDUCIAL1X2  [FIDUCIAL-1X2]  174.5,164.59 0 top
JP324  USB_MICROB_PLUGCONN-11752  [USB-B-MICRO-SMD_V03]  200.53,155.7 180 top
JP325  [1X09]  211.33,164.59 0 top
JP326  [1X09]  211.33,146.81 0 top
JP327  [1X04]  206.25,151.89 90 top
JP328  FIDUCIAL1X2  [FIDUCIAL-1X2]  234.19,146.81 0 top
JP329  FIDUCIAL1X2  [FIDUCIAL-1X2]  207.52,164.59 0 top
JP330  USB_MICROB_PLUGCONN-11752  [USB-B-MICRO-SMD_V03]  233.55,155.7 180 top
JP331  [1X09]  244.35,164.59 0 top
JP332  [1X09]  244.35,146.81 0 top
JP333  [1X04]  239.27,151.89 90 top
JP334  FIDUCIAL1X2  [FIDUCIAL-1X2]  267.21,146.81 0 top
JP335  FIDUCIAL1X2  [FIDUCIAL-1X2]  240.54,164.59 0 top
JP336  USB_MICROB_PLUGCONN-11752  [USB-B-MICRO-SMD_V03]  266.57,155.7 180 top
JP337  [1X09]  13.21,185.42 0 top
JP338  [1X09]  13.21,167.64 0 top
JP339  [1X04]  8.13,172.72 90 top
JP340  FIDUCIAL1X2  [FIDUCIAL-1X2]  36.07,167.64 0 top
JP341  FIDUCIAL1X2  [FIDUCIAL-1X2]  9.4,185.42 0 top
JP342  USB_MICROB_PLUGCONN-11752  [USB-B-MICRO-SMD_V03]  35.43,176.53 180 top
JP343  [1X09]  46.23,185.42 0 top
JP344  [1X09]  46.23,167.64 0 top
JP345  [1X04]  41.15,172.72 90 top
JP346  FIDUCIAL1X2  [FIDUCIAL-1X2]  69.09,167.64 0 top
JP347  FIDUCIAL1X2  [FIDUCIAL-1X2]  42.42,185.42 0 top
JP348  USB_MICROB_PLUGCONN-11752  [USB-B-MICRO-SMD_V03]  68.45,176.53 180 top
JP349  [1X09]  79.25,185.42 0 top
JP350  [1X09]  79.25,167.64 0 top
JP351  [1X04]  74.17,172.72 90 top
JP352  FIDUCIAL1X2  [FIDUCIAL-1X2]  102.11,167.64 0 top
JP353  FIDUCIAL1X2  [FIDUCIAL-1X2]  75.44,185.42 0 top
JP354  USB_MICROB_PLUGCONN-11752  [USB-B-MICRO-SMD_V03]  101.47,176.53 180 top
JP355  [1X09]  112.27,185.42 0 top
JP356  [1X09]  112.27,167.64 0 top
JP357  [1X04]  107.19,172.72 90 top
JP358  FIDUCIAL1X2  [FIDUCIAL-1X2]  135.13,167.64 0 top
JP359  FIDUCIAL1X2  [FIDUCIAL-1X2]  108.46,185.42 0 top
JP360  USB_MICROB_PLUGCONN-11752  [USB-B-MICRO-SMD_V03]  134.49,176.53 180 top
JP361  [1X09]  145.29,185.42 0 top
JP362  [1X09]  145.29,167.64 0 top
JP363  [1X04]  140.21,172.72 90 top
JP364  FIDUCIAL1X2  [FIDUCIAL-1X2]  168.15,167.64 0 top
JP365  FIDUCIAL1X2  [FIDUCIAL-1X2]  141.48,185.42 0 top
JP366  USB_MICROB_PLUGCONN-11752  [USB-B-MICRO-SMD_V03]  167.51,176.53 180 top
JP367  [1X09]  178.31,185.42 0 top
JP368  [1X09]  178.31,167.64 0 top
JP369  [1X04]  173.23,172.72 90 top
JP370  FIDUCIAL1X2  [FIDUCIAL-1X2]  201.17,167.64 0 top
JP371  FIDUCIAL1X2  [FIDUCIAL-1X2]  174.5,185.42 0 top
JP372  USB_MICROB_PLUGCONN-11752  [USB-B-MICRO-SMD_V03]  200.53,176.53 180 top
JP373  [1X09]  211.33,185.42 0 top
JP374  [1X09]  211.33,167.64 0 top
JP375  [1X04]  206.25,172.72 90 top
JP376  FIDUCIAL1X2  [FIDUCIAL-1X2]  234.19,167.64 0 top
JP377  FIDUCIAL1X2  [FIDUCIAL-1X2]  207.52,185.42 0 top
JP378  USB_MICROB_PLUGCONN-11752  [USB-B-MICRO-SMD_V03]  233.55,176.53 180 top
JP379  [1X09]  244.35,185.42 0 top
JP380  [1X09]  244.35,167.64 0 top
JP381  [1X04]  239.27,172.72 90 top
JP382  FIDUCIAL1X2  [FIDUCIAL-1X2]  267.21,167.64 0 top
JP383  FIDUCIAL1X2  [FIDUCIAL-1X2]  240.54,185.42 0 top
JP384  USB_MICROB_PLUGCONN-11752  [USB-B-MICRO-SMD_V03]  266.57,176.53 180 top
LED1  Red  [LED-0603]  9.4,10.03 0 top
LED2  Green  [LED-0603]  9.4,24 180 top
LED3  Red  [LED-0603]  42.42,10.03 0 top
LED4  Green  [LED-0603]  42.42,24 180 top
LED5  Red  [LED-0603]  75.44,10.03 0 top
LED6  Green  [LED-0603]  75.44,24 180 top
LED7  Red  [LED-0603]  108.46,10.03 0 top
LED8  Green  [LED-0603]  108.46,24 180 top
LED9  Red  [LED-0603]  141.48,10.03 0 top
LED10  Green  [LED-0603]  141.48,24 180 top
LED11  Red  [LED-0603]  174.5,10.03 0 top
LED12  Green  [LED-0603]  174.5,24 180 top
LED13  Red  [LED-0603]  207.52,10.03 0 top
LED14  Green  [LED-0603]  207.52,24 180 top
LED15  Red  [LED-0603]  240.54,10.03 0 top
LED16  Green  [LED-0603]  240.54,24 180 top
LED17  Red  [LED-0603]  9.4,30.86 0 top
LED18  Green  [LED-0603]  9.4,44.83 180 top
LED19  Red  [LED-0603]  42.42,30.86 0 top
LED20  Green  [LED-0603]  42.42,44.83 180 top
LED21  Red  [LED-0603]  75.44,30.86 0 top
LED22  Green  [LED-0603]  75.44,44.83 180 top
LED23  Red  [LED-0603]  108.46,30.86 0 top
LED24  Green  [LED-0603]  108.46,44.83 180 top
LED25  Red  [LED-0603]  141.48,30.86 0 top
LED26  Green  [LED-0603]  141.48,44.83 180 top
LED27  Red  [LED-0603]  174.5,30.86 0 top
LED28  Green  [LED-0603]  174.5,44.83 180 top
LED29  Red  [LED-0603]  207.52,30.86 0 top
LED30  Green  [LED-0603]  207.52,44.83 180 top
LED31  Red  [LED-0603]  240.54,30.86 0 top
LED32  Green  [LED-0603]  240.54,44.83 180 top
LED33  Red  [LED-0603]  9.4,51.69 0 top
LED34  Green  [LED-0603]  9.4,65.66 180 top
LED35  Red  [LED-0603]  42.42,51.69 0 top
LED36  Green  [LED-0603]  42.42,65.66 180 top
LED37  Red  [LED-0603]  75.44,51.69 0 top
LED38  Green  [LED-0603]  75.44,65.66 180 top
LED39  Red  [LED-0603]  108.46,51.69 0 top
LED40  Green  [LED-0603]  108.46,65.66 180 top
LED41  Red  [LED-0603]  141.48,51.69 0 top
LED42  Green  [LED-0603]  141.48,65.66 180 top
LED43  Red  [LED-0603]  174.5,51.69 0 top
LED44  Green  [LED-0603]  174.5,65.66 180 top
LED45  Red  [LED-0603]  207.52,51.69 0 top
LED46  Green  [LED-0603]  207.52,65.66 180 top
LED47  Red  [LED-0603]  240.54,51.69 0 top
LED48  Green  [LED-0603]  240.54,65.66 180 top
LED49  Red  [LED-0603]  9.4,72.52 0 top
LED50  Green  [LED-0603]  9.4,86.49 180 top
LED51  Red  [LED-0603]  42.42,72.52 0 top
LED52  Green  [LED-0603]  42.42,86.49 180 top
LED53  Red  [LED-0603]  75.44,72.52 0 top
LED54  Green  [LED-0603]  75.44,86.49 180 top
LED55  Red  [LED-0603]  108.46,72.52 0 top
LED56  Green  [LED-0603]  108.46,86.49 180 top
LED57  Red  [LED-0603]  141.48,72.52 0 top
LED58  Green  [LED-0603]  141.48,86.49 180 top
LED59  Red  [LED-0603]  174.5,72.52 0 top
LED60  Green  [LED-0603]  174.5,86.49 180 top
LED61  Red  [LED-0603]  207.52,72.52 0 top
LED62  Green  [LED-0603]  207.52,86.49 180 top
LED63  Red  [LED-0603]  240.54,72.52 0 top
LED64  Green  [LED-0603]  240.54,86.49 180 top
LED65  Red  [LED-0603]  9.4,107.06 0 top
LED66  Green  [LED-0603]  9.4,121.03 180 top
LED67  Red  [LED-0603]  42.42,107.06 0 top
LED68  Green  [LED-0603]  42.42,121.03 180 top
LED69  Red  [LED-0603]  75.44,107.06 0 top
LED70  Green  [LED-0603]  75.44,121.03 180 top
LED71  Red  [LED-0603]  108.46,107.06 0 top
LED72  Green  [LED-0603]  108.46,121.03 180 top
LED73  Red  [LED-0603]  141.48,107.06 0 top
LED74  Green  [LED-0603]  141.48,121.03 180 top
LED75  Red  [LED-0603]  174.5,107.06 0 top
LED76  Green  [LED-0603]  174.5,121.03 180 top
LED77  Red  [LED-0603]  207.52,107.06 0 top
LED78  Green  [LED-0603]  207.52,121.03 180 top
LED79  Red  [LED-0603]  240.54,107.06 0 top
LED80  Green  [LED-0603]  240.54,121.03 180 top
LED81  Red  [LED-0603]  9.4,127.89 0 top
LED82  Green  [LED-0603]  9.4,141.86 180 top
LED83  Red  [LED-0603]  42.42,127.89 0 top
LED84  Green  [LED-0603]  42.42,141.86 180 top
LED85  Red  [LED-0603]  75.44,127.89 0 top
LED86  Green  [LED-0603]  75.44,141.86 180 top
LED87  Red  [LED-0603]  108.46,127.89 0 top
LED88  Green  [LED-0603]  108.46,141.86 180 top
LED89  Red  [LED-0603]  141.48,127.89 0 top
LED90  Green  [LED-0603]  141.48,141.86 180 top
LED91  Red  [LED-0603]  174.5,127.89 0 top
LED92  Green  [LED-0603]  174.5,141.86 180 top
LED93  Red  [LED-0603]  207.52,127.89 0 top
LED94  Green  [LED-0603]  207.52,141.86 180 top
LED95  Red  [LED-0603]  240.54,127.89 0 top
LED96  Green  [LED-0603]  240.54,141.86 180 top
LED97  Red  [LED-0603]  9.4,148.72 0 top
LED98  Green  [LED-0603]  9.4,162.69 180 top
LED99  Red  [LED-0603]  42.42,148.72 0 top
LED100  Green  [LED-0603]  42.42,162.69 180 top
LED101  Red  [LED-0603]  75.44,148.72 0 top
LED102  Green  [LED-0603]  75.44,162.69 180 top
LED103  Red  [LED-0603]  108.46,148.72 0 top
LED104  Green  [LED-0603]  108.46,162.69 180 top
LED105  Red  [LED-0603]  141.48,148.72 0 top
LED106  Green  [LED-0603]  141.48,162.69 180 top
LED107  Red  [LED-0603]  174.5,148.72 0 top
LED108  Green  [LED-0603]  174.5,162.69 180 top
LED109  Red  [LED-0603]  207.52,148.72 0 top
LED110  Green  [LED-0603]  207.52,162.69 180 top
LED111  Red  [LED-0603]  240.54,148.72 0 top
LED112  Green  [LED-0603]  240.54,162.69 180 top
LED113  Red  [LED-0603]  9.4,169.54 0 top
LED114  Green  [LED-0603]  9.4,183.51 180 top
LED115  Red  [LED-0603]  42.42,169.54 0 top
LED116  Green  [LED-0603]  42.42,183.51 180 top
LED117  Red  [LED-0603]  75.44,169.54 0 top
LED118  Green  [LED-0603]  75.44,183.51 180 top
LED119  Red  [LED-0603]  108.46,169.54 0 top
LED120  Green  [LED-0603]  108.46,183.51 180 top
LED121  Red  [LED-0603]  141.48,169.54 0 top
LED122  Green  [LED-0603]  141.48,183.51 180 top
LED123  Red  [LED-0603]  174.5,169.54 0 top
LED124  Green  [LED-0603]  174.5,183.51 180 top
LED125  Red  [LED-0603]  207.52,169.54 0 top
LED126  Green  [LED-0603]  207.52,183.51 180 top
LED127  Red  [LED-0603]  240.54,169.54 0 top
LED128  Green  [LED-0603]  240.54,183.51 180 top
LOGO1  OSHW-LOGOS  [OSHW-LOGO-S]  24.64,17.02 90 bottom
LOGO2  OSHW-LOGOS  [OSHW-LOGO-S]  57.66,17.02 90 bottom
LOGO3  OSHW-LOGOS  [OSHW-LOGO-S]  90.68,17.02 90 bottom
LOGO4  OSHW-LOGOS  [OSHW-LOGO-S]  123.7,17.02 90 bottom
LOGO5  OSHW-LOGOS  [OSHW-LOGO-S]  156.72,17.02 90 bottom
LOGO6  OSHW-LOGOS  [OSHW-LOGO-S]  189.74,17.02 90 bottom
LOGO7  OSHW-LOGOS  [OSHW-LOGO-S]  222.76,17.02 90 bottom
LOGO8  OSHW-LOGOS  [OSHW-LOGO-S]  255.78,17.02 90 bottom
LOGO9  OSHW-LOGOS  [OSHW-LOGO-S]  24.64,37.85 90 bottom
LOGO10  OSHW-LOGOS  [OSHW-LOGO-S]  57.66,37.85 90 bottom
LOGO11  OSHW-LOGOS  [OSHW-LOGO-S]  90.68,37.85 90 bottom
LOGO12  OSHW-LOGOS  [OSHW-LOGO-S]  123.7,37.85 90 bottom
LOGO13  OSHW-LOGOS  [OSHW-LOGO-S]  156.72,37.85 90 bottom
LOGO14  OSHW-LOGOS  [OSHW-LOGO-S]  189.74,37.85 90 bottom
LOGO15  OSHW-LOGOS  [OSHW-LOGO-S]  222.76,37.85 90 bottom
LOGO16  OSHW-LOGOS  [OSHW-LOGO-S]  255.78,37.85 90 bottom
LOGO17  OSHW-LOGOS  [OSHW-LOGO-S]  24.64,58.67 90 bottom
LOGO18  OSHW-LOGOS  [OSHW-LOGO-S]  57.66,58.67 90 bottom
LOGO19  OSHW-LOGOS  [OSHW-LOGO-S]  90.68,58.67 90 bottom
LOGO20  OSHW-LOGOS  [OSHW-LOGO-S]  123.7,58.67 90 bottom
LOGO21  OSHW-LOGOS  [OSHW-LOGO-S]  156.72,58.67 90 bottom
LOGO22  OSHW-LOGOS  [OSHW-LOGO-S]  189.74,58.67 90 bottom
LOGO23  OSHW-LOGOS  [OSHW-LOGO-S]  222.76,58.67 90 bottom
LOGO24  OSHW-LOGOS  [OSHW-LOGO-S]  255.78,58.67 90 bottom
LOGO25  OSHW-LOGOS  [OSHW-LOGO-S]  24.64,79.5 90 bottom
LOGO26  OSHW-LOGOS  [OSHW-LOGO-S]  57.66,79.5 90 bottom
LOGO27  OSHW-LOGOS  [OSHW-LOGO-S]  90.68,79.5 90 bottom
LOGO28  OSHW-LOGOS  [OSHW-LOGO-S]  123.7,79.5 90 bottom
LOGO29  OSHW-LOGOS  [OSHW-LOGO-S]  156.72,79.5 90 bottom
LOGO30  OSHW-LOGOS  [OSHW-LOGO-S]  189.74,79.5 90 bottom
LOGO31  OSHW-LOGOS  [OSHW-LOGO-S]  222.76,79.5 90 bottom
LOGO32  OSHW-LOGOS  [OSHW-LOGO-S]  255.78,79.5 90 bottom
LOGO33  OSHW-LOGOS  [OSHW-LOGO-S]  24.64,114.05 90 bottom
LOGO34  OSHW-LOGOS  [OSHW-LOGO-S]  57.66,114.05 90 bottom
LOGO35  OSHW-LOGOS  [OSHW-LOGO-S]  90.68,114.05 90 bottom
LOGO36  OSHW-LOGOS  [OSHW-LOGO-S]  123.7,114.05 90 bottom
LOGO37  OSHW-LOGOS  [OSHW-LOGO-S]  156.72,114.05 90 bottom
LOGO38  OSHW-LOGOS  [OSHW-LOGO-S]  189.74,114.05 90 bottom
LOGO39  OSHW-LOGOS  [OSHW-LOGO-S]  222.76,114.05 90 bottom
LOGO40  OSHW-LOGOS  [OSHW-LOGO-S]  255.78,114.05 90 bottom
LOGO41  OSHW-LOGOS  [OSHW-LOGO-S]  24.64,134.87 90 bottom
LOGO42  OSHW-LOGOS  [OSHW-LOGO-S]  57.66,134.87 90 bottom
LOGO43  OSHW-LOGOS  [OSHW-LOGO-S]  90.68,134.87 90 bottom
LOGO44  OSHW-LOGOS  [OSHW-LOGO-S]  123.7,134.87 90 bottom
LOGO45  OSHW-LOGOS  [OSHW-LOGO-S]  156.72,134.87 90 bottom
LOGO46  OSHW-LOGOS  [OSHW-LOGO-S]  189.74,134.87 90 bottom
LOGO47  OSHW-LOGOS  [OSHW-LOGO-S]  222.76,134.87 90 bottom
LOGO48  OSHW-LOGOS  [OSHW-LOGO-S]  255.78,134.87 90 bottom
LOGO49  OSHW-LOGOS  [OSHW-LOGO-S]  24.64,155.7 90 bottom
LOGO50  OSHW-LOGOS  [OSHW-LOGO-S]  57.66,155.7 90 bottom
LOGO51  OSHW-LOGOS  [OSHW-LOGO-S]  90.68,155.7 90 bottom
LOGO52  OSHW-LOGOS  [OSHW-LOGO-S]  123.7,155.7 90 bottom
LOGO53  OSHW-LOGOS  [OSHW-LOGO-S]  156.72,155.7 90 bottom
LOGO54  OSHW-LOGOS  [OSHW-LOGO-S]  189.74,155.7 90 bottom
LOGO55  OSHW-LOGOS  [OSHW-LOGO-S]  222.76,155.7 90 bottom
LOGO56  OSHW-LOGOS  [OSHW-LOGO-S]  255.78,155.7 90 bottom
LOGO57  OSHW-LOGOS  [OSHW-LOGO-S]  24.64,176.53 90 bottom
LOGO58  OSHW-LOGOS  [OSHW-LOGO-S]  57.66,176.53 90 bottom
LOGO59  OSHW-LOGOS  [OSHW-LOGO-S]  90.68,176.53 90 bottom
LOGO60  OSHW-LOGOS  [OSHW-LOGO-S]  123.7,176.53 90 bottom
LOGO61  OSHW-LOGOS  [OSHW-LOGO-S]  156.72,176.53 90 bottom
LOGO62  OSHW-LOGOS  [OSHW-LOGO-S]  189.74,176.53 90 bottom
LOGO63  OSHW-LOGOS  [OSHW-LOGO-S]  222.76,176.53 90 bottom
LOGO64  OSHW-LOGOS  [OSHW-LOGO-S]  255.78,176.53 90 bottom
R1  330  [0603-RES]  11.94,10.67 0 top
R2  330  [0603-RES]  8.13,24 270 top
R3  330  [0603-RES]  44.96,10.67 0 top
R4  330  [0603-RES]  41.15,24 270 top
R5  330  [0603-RES]  77.98,10.67 0 top
R6  330  [0603-RES]  74.17,24 270 top
R7  330  [0603-RES]  111,10.67 0 top
R8  330  [0603-RES]  107.19,24 270 top
R9  330  [0603-RES]  144.02,10.67 0 top
R10  330  [0603-RES]  140.21,24 270 top
R11  330  [0603-RES]  177.04,10.67 0 top
R12  330  [0603-RES]  173.23,24 270 top
R13  330  [0603-RES]  210.06,10.67 0 top
R14  330  [0603-RES]  206.25,24 270 top
R15  330  [0603-RES]  243.08,10.67 0 top
R16  330  [0603-RES]  239.27,24 270 top
R17  330  [0603-RES]  11.94,31.5 0 top
R18  330  [0603-RES]  8.13,44.83 270 top
R19  330  [0603-RES]  44.96,31.5 0 top
R20  330  [0603-RES]  41.15,44.83 270 top
R21  330  [0603-RES]  77.98,31.5 0 top
R22  330  [0603-RES]  74.17,44.83 270 top
R23  330  [0603-RES]  111,31.5 0 top
R24  330  [0603-RES]  107.19,44.83 270 top
R25  330  [0603-RES]  144.02,31.5 0 top
R26  330  [0603-RES]  140.21,44.83 270 top
R27  330  [0603-RES]  177.04,31.5 0 top
R28  330  [0603-RES]  173.23,44.83 270 top
R29  330  [0603-RES]  210.06,31.5 0 top
R30  330  [0603-RES]  206.25,44.83 270 top
R31  330  [0603-RES]  243.08,31.5 0 top
R32  330  [0603-RES]  239.27,44.83 270 top
R33  330  [0603-RES]  11.94,52.32 0 top
R34  330  [0603-RES]  8.13,65.66 270 top
R35  330  [0603-RES]  44.96,52.32 0 top
R36  330  [0603-RES]  41.15,65.66 270 top
R37  330  [0603-RES]  77.98,52.32 0 top
R38  330  [0603-RES]  74.17,65.66 270 top
R39  330  [0603-RES]  111,52.32 0 top
R40  330  [0603-RES]  107.19,65.66 270 top
R41  330  [0603-RES]  144.02,52.32 0 top
R42  330  [0603-RES]  140.21,65.66 270 top
R43  330  [0603-RES]  177.04,52.32 0 top
R44  330  [0603-RES]  173.23,65.66 270 top
R45  330  [0603-RES]  210.06,52.32 0 top
R46  330  [0603-RES]  206.25,65.66 270 top
R47  330  [0603-RES]  243.08,52.32 0 top
R48  330  [0603-RES]  239.27,65.66 270 top
R49  330  [0603-RES]  11.94,73.15 0 top
R50  330  [0603-RES]  8.13,86.49 270 top
R51  330  [0603-RES]  44.96,73.15 0 top
R52  330  [0603-RES]  41.15,86.49 270 top
R53  330  [0603-RES]  77.98,73.15 0 top
R54  330  [0603-RES]  74.17,86.49 270 top
R55  330  [0603-RES]  111,73.15 0 top
R56  330  [0603-RES]  107.19,86.49 270 top
R57  330  [0603-RES]  144.02,73.15 0 top
R58  330  [0603-RES]  140.21,86.49 270 top
R59  330  [0603-RES]  177.04,73.15 0 top
R60  330  [0603-RES]  173.23,86.49 270 top
R61  330  [0603-RES]  210.06,73.15 0 top
R62  330  [0603-RES]  206.25,86.49 270 top
R63  330  [0603-RES]  243.08,73.15 0 top
R64  330  [0603-RES]  239.27,86.49 270 top
R65  330  [0603-RES]  11.94,107.7 0 top
R66  330  [0603-RES]  8.13,121.03 270 top
R67  330  [0603-RES]  44.96,107.7 0 top
R68  330  [0603-RES]  41.15,121.03 270 top
R69  330  [0603-RES]  77.98,107.7 0 top
R70  330  [0603-RES]  74.17,121.03 270 top
R71  330  [0603-RES]  111,107.7 0 top
R72  330  [0603-RES]  107.19,121.03 270 top
R73  330  [0603-RES]  144.02,107.7 0 top
R74  330  [0603-RES]  140.21,121.03 270 top
R75  330  [0603-RES]  177.04,107.7 0 top
R76  330  [0603-RES]  173.23,121.03 270 top
R77  330  [0603-RES]  210.06,107.7 0 top
R78  330  [0603-RES]  206.25,121.03 270 top
R79  330  [0603-RES]  243.08,107.7 0 top
R80  330  [0603-RES]  239.27,121.03 270 top
R81  330  [0603-RES]  11.94,128.52 0 top
R82  330  [0603-RES]  8.13,141.86 270 top
R83  330  [0603-RES]  44.96,128.52 0 top
R84  330  [0603-RES]  41.15,141.86 270 top
R85  330  [0603-RES]  77.98,128.52 0 top
R86  330  [0603-RES]  74.17,141.86 270 top
R87  330  [0603-RES]  111,128.52 0 top
R88  330  [0603-RES]  107.19,141.86 270 top
R89  330  [0603-RES]  144.02,128.52 0 top
R90  330  [0603-RES]  140.21,141.86 270 top
R91  330  [0603-RES]  177.04,128.52 0 top
R92  330  [0603-RES]  173.23,141.86 270 top
R93  330  [0603-RES]  210.06,128.52 0 top
R94  330  [0603-RES]  206.25,141.86 270 top
R95  330  [0603-RES]  243.08,128.52 0 top
R96  330  [0603-RES]  239.27,141.86 270 top
R97  330  [0603-RES]  11.94,149.35 0 top
R98  330  [0603-RES]  8.13,162.69 270 top
R99  330  [0603-RES]  44.96,149.35 0 top
R100  330  [0603-RES]  41.15,162.69 270 top
R101  330  [0603-RES]  77.98,149.35 0 top
R102  330  [0603-RES]  74.17,162.69 270 top
R103  330  [0603-RES]  111,149.35 0 top
R104  330  [0603-RES]  107.19,162.69 270 top
R105  330  [0603-RES]  144.02,149.35 0 top
R106  330  [0603-RES]  140.21,162.69 270 top
R107  330  [0603-RES]  177.04,149.35 0 top
R108  330  [0603-RES]  173.23,162.69 270 top
R109  330  [0603-RES]  210.06,149.35 0 top
R110  330  [0603-RES]  206.25,162.69 270 top
R111  330  [0603-RES]  243.08,149.35 0 top
R112  330  [0603-RES]  239.27,162.69 270 top
R113  330  [0603-RES]  11.94,170.18 0 top
R114  330  [0603-RES]  8.13,183.51 270 top
R115  330  [0603-RES]  44.96,170.18 0 top
R116  330  [0603-RES]  41.15,183.51 270 top
R117  330  [0603-RES]  77.98,170.18 0 top
R118  330  [0603-RES]  74.17,183.51 270 top
R119  330  [0603-RES]  111,170.18 0 top
R120  330  [0603-RES]  107.19,183.51 270 top
R121  330  [0603-RES]  144.02,170.18 0 top
R122  330  [0603-RES]  140.21,183.51 270 top
R123  330  [0603-RES]  177.04,170.18 0 top
R124  330  [0603-RES]  173.23,183.51 270 top
R125  330  [0603-RES]  210.06,170.18 0 top
R126  330  [0603-RES]  206.25,183.51 270 top
R127  330  [0603-RES]  243.08,170.18 0 top
R128  330  [0603-RES]  239.27,183.51 270 top
S1  [AYZ0202]  27.81,17.02 90 top
S2  [AYZ0202]  60.83,17.02 90 top
S3  [AYZ0202]  93.85,17.02 90 top
S4  [AYZ0202]  126.87,17.02 90 top
S5  [AYZ0202]  159.89,17.02 90 top
S6  [AYZ0202]  192.91,17.02 90 top
S7  [AYZ0202]  225.93,17.02 90 top
S8  [AYZ0202]  258.95,17.02 90 top
S9  [AYZ0202]  27.81,37.85 90 top
S10  [AYZ0202]  60.83,37.85 90 top
S11  [AYZ0202]  93.85,37.85 90 top
S12  [AYZ0202]  126.87,37.85 90 top
S13  [AYZ0202]  159.89,37.85 90 top
S14  [AYZ0202]  192.91,37.85 90 top
S15  [AYZ0202]  225.93,37.85 90 top
S16  [AYZ0202]  258.95,37.85 90 top
S17  [AYZ0202]  27.81,58.67 90 top
S18  [AYZ0202]  60.83,58.67 90 top
S19  [AYZ0202]  93.85,58.67 90 top
S20  [AYZ0202]  126.87,58.67 90 top
S21  [AYZ0202]  159.89,58.67 90 top
S22  [AYZ0202]  192.91,58.67 90 top
S23  [AYZ0202]  225.93,58.67 90 top
S24  [AYZ0202]  258.95,58.67 90 top
S25  [AYZ0202]  27.81,79.5 90 top
S26  [AYZ0202]  60.83,79.5 90 top
S27  [AYZ0202]  93.85,79.5 90 top
S28  [AYZ0202]  126.87,79.5 90 top
S29  [AYZ0202]  159.89,79.5 90 top
S30  [AYZ0202]  192.91,79.5 90 top
S31  [AYZ0202]  225.93,79.5 90 top
S32  [AYZ0202]  258.95,79.5 90 top
S33  [AYZ0202]  27.81,114.05 90 top
S34  [AYZ0202]  60.83,114.05 90 top
S35  [AYZ0202]  93.85,114.05 90 top
S36  [AYZ0202]  126.87,114.05 90 top
S37  [AYZ0202]  159.89,114.05 90 top
S38  [AYZ0202]  192.91,114.05 90 top
S39  [AYZ0202]  225.93,114.05 90 top
S40  [AYZ0202]  258.95,114.05 90 top
S41  [AYZ0202]  27.81,134.87 90 top
S42  [AYZ0202]  60.83,134.87 90 top
S43  [AYZ0202]  93.85,134.87 90 top
S44  [AYZ0202]  126.87,134.87 90 top
S45  [AYZ0202]  159.89,134.87 90 top
S46  [AYZ0202]  192.91,134.87 90 top
S47  [AYZ0202]  225.93,134.87 90 top
S48  [AYZ0202]  258.95,134.87 90 top
S49  [AYZ0202]  27.81,155.7 90 top
S50  [AYZ0202]  60.83,155.7 90 top
S51  [AYZ0202]  93.85,155.7 90 top
S52  [AYZ0202]  126.87,155.7 90 top
S53  [AYZ0202]  159.89,155.7 90 top
S54  [AYZ0202]  192.91,155.7 90 top
S55  [AYZ0202]  225.93,155.7 90 top
S56  [AYZ0202]  258.95,155.7 90 top
S57  [AYZ0202]  27.81,176.53 90 top
S58  [AYZ0202]  60.83,176.53 90 top
S59  [AYZ0202]  93.85,176.53 90 top
S60  [AYZ0202]  126.87,176.53 90 top
S61  [AYZ0202]  159.89,176.53 90 top
S62  [AYZ0202]  192.91,176.53 90 top
S63  [AYZ0202]  225.93,176.53 90 top
S64  [AYZ0202]  258.95,176.53 90 top
U1  FT232R  [SSOP28DB]  18.92,17.02 0 top
U2  FT232R  [SSOP28DB]  51.94,17.02 0 top
U3  FT232R  [SSOP28DB]  84.96,17.02 0 top
U4  FT232R  [SSOP28DB]  117.98,17.02 0 top
U5  FT232R  [SSOP28DB]  151,17.02 0 top
U6  FT232R  [SSOP28DB]  184.02,17.02 0 top
U7  FT232R  [SSOP28DB]  217.04,17.02 0 top
U8  FT232R  [SSOP28DB]  250.06,17.02 0 top